# Altium PCB LCD TEST BOART-A8.PcbDoc (part 1 of 2)
Units mm, origin at the board's own origin, x right, y up, seen from the top; angles counter-clockwise.
Board outline 152.4 x 101.6 mm, 2 copper layers (Top Layer, Bottom Layer); 153 components, 128 nets, 620 pads, 196 vias.
Unrouted connection lines stored in the file: 57.
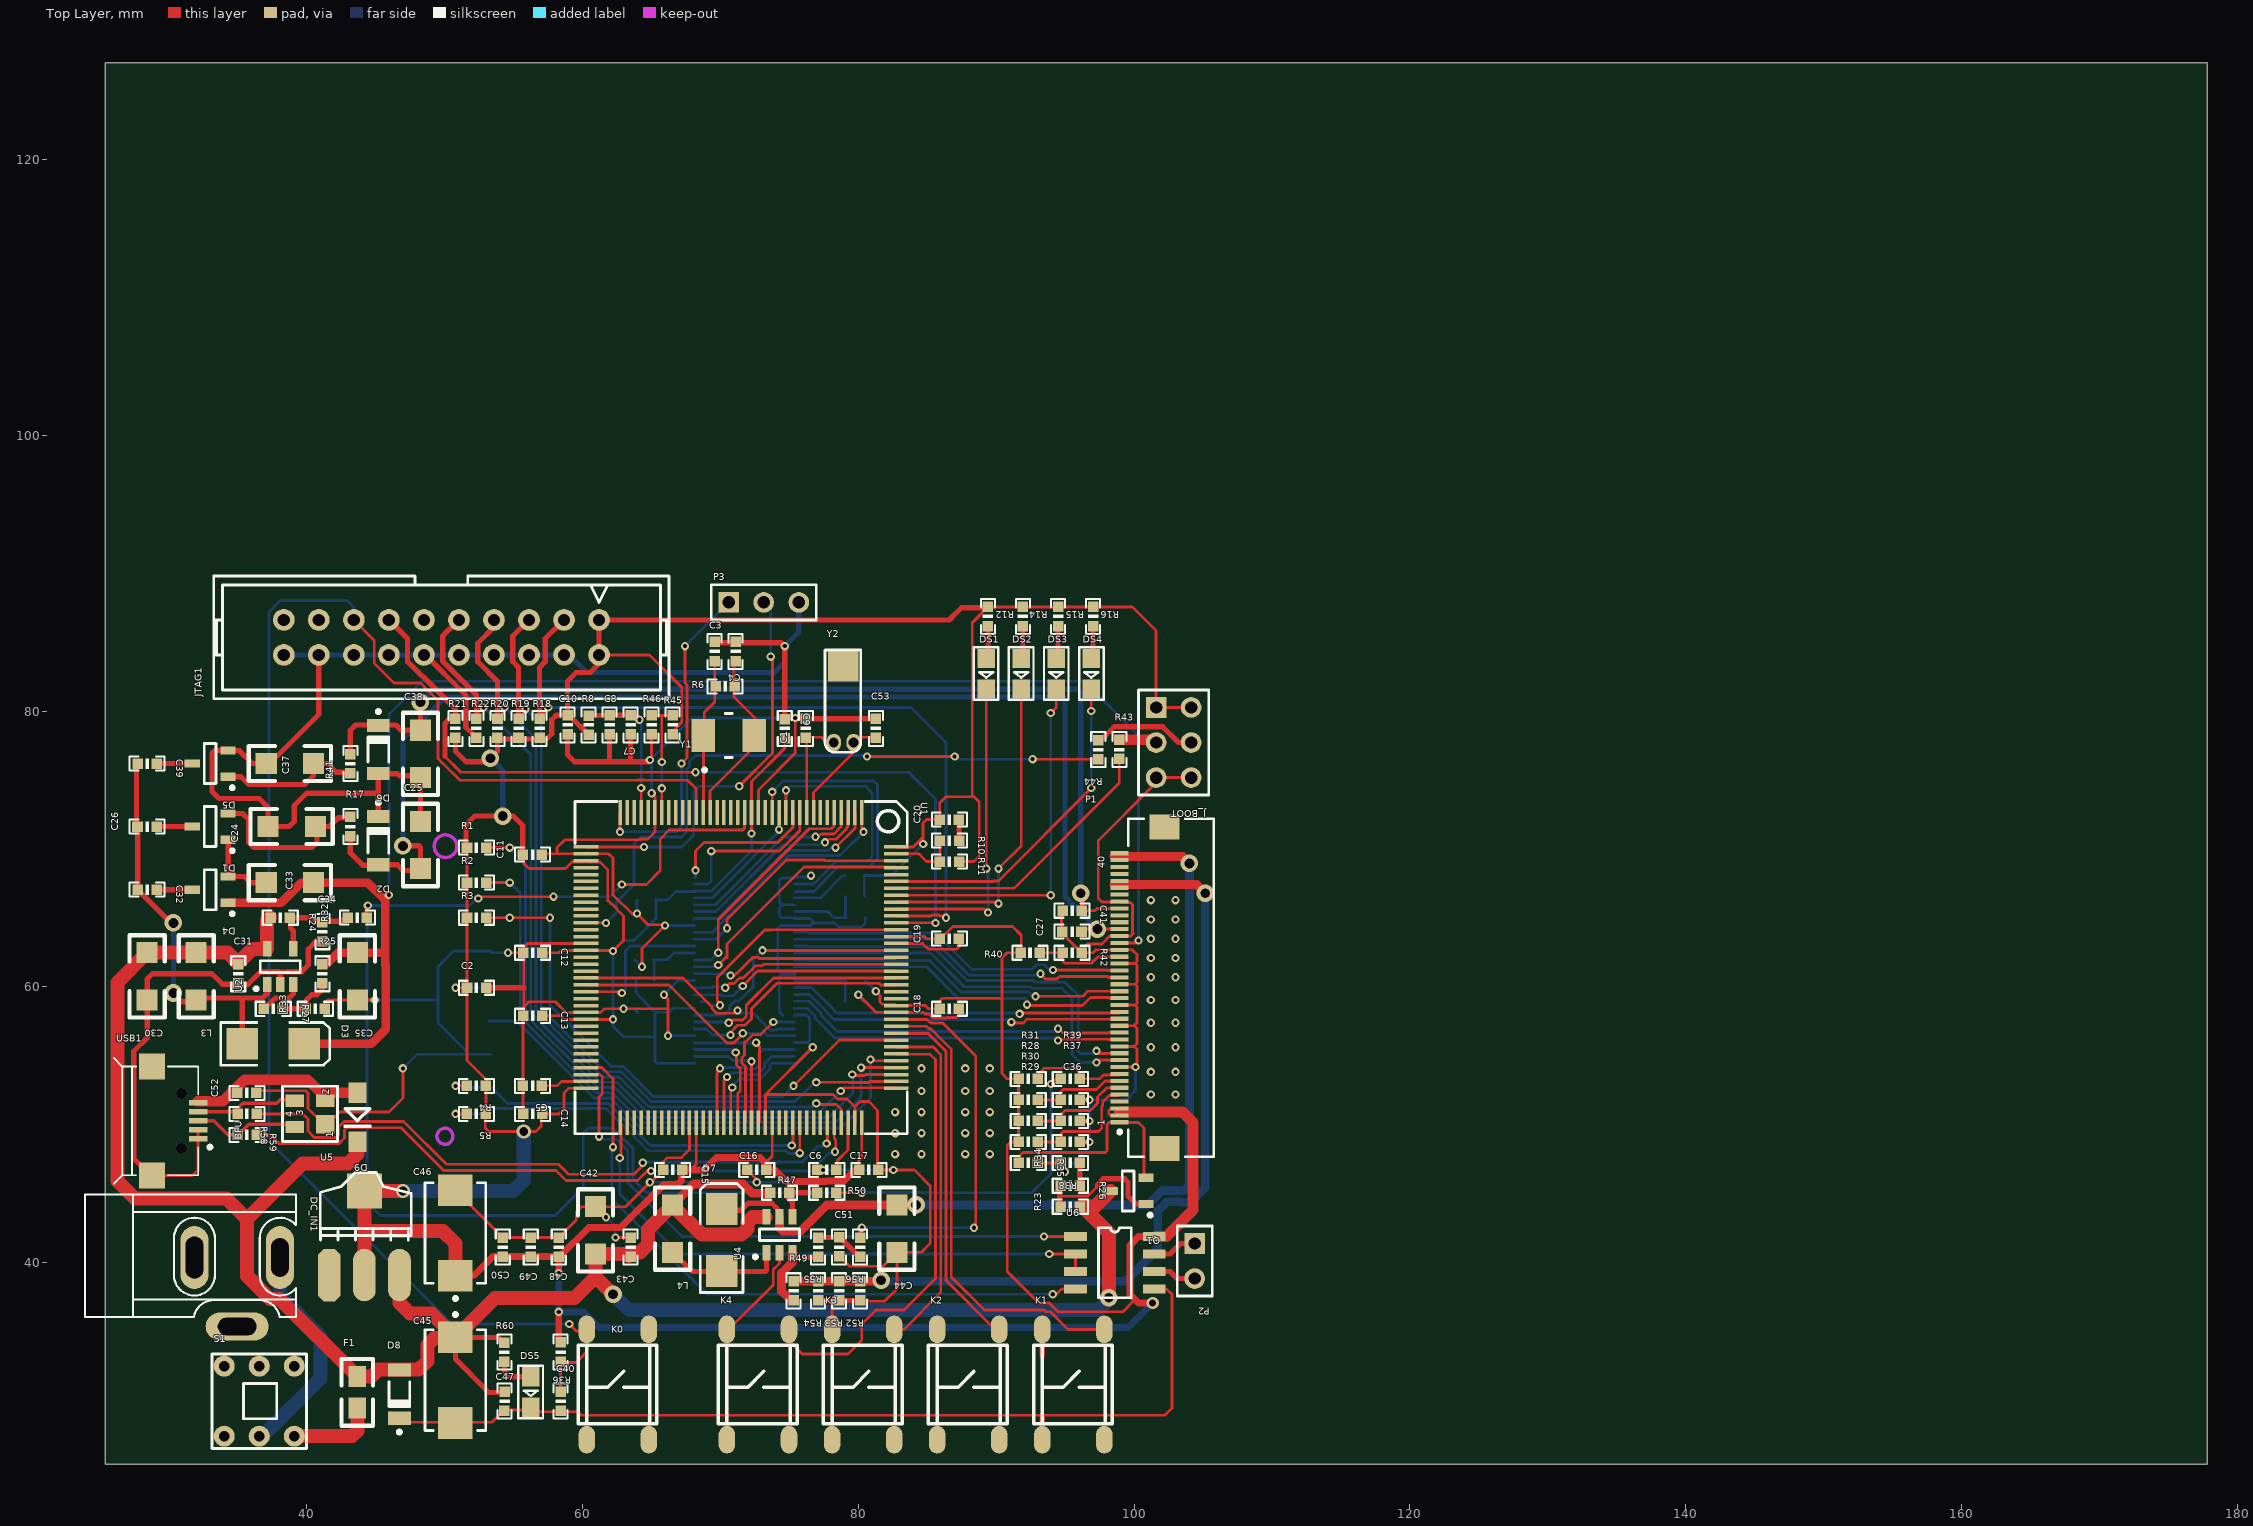
[diagram p0: Top Layer view]
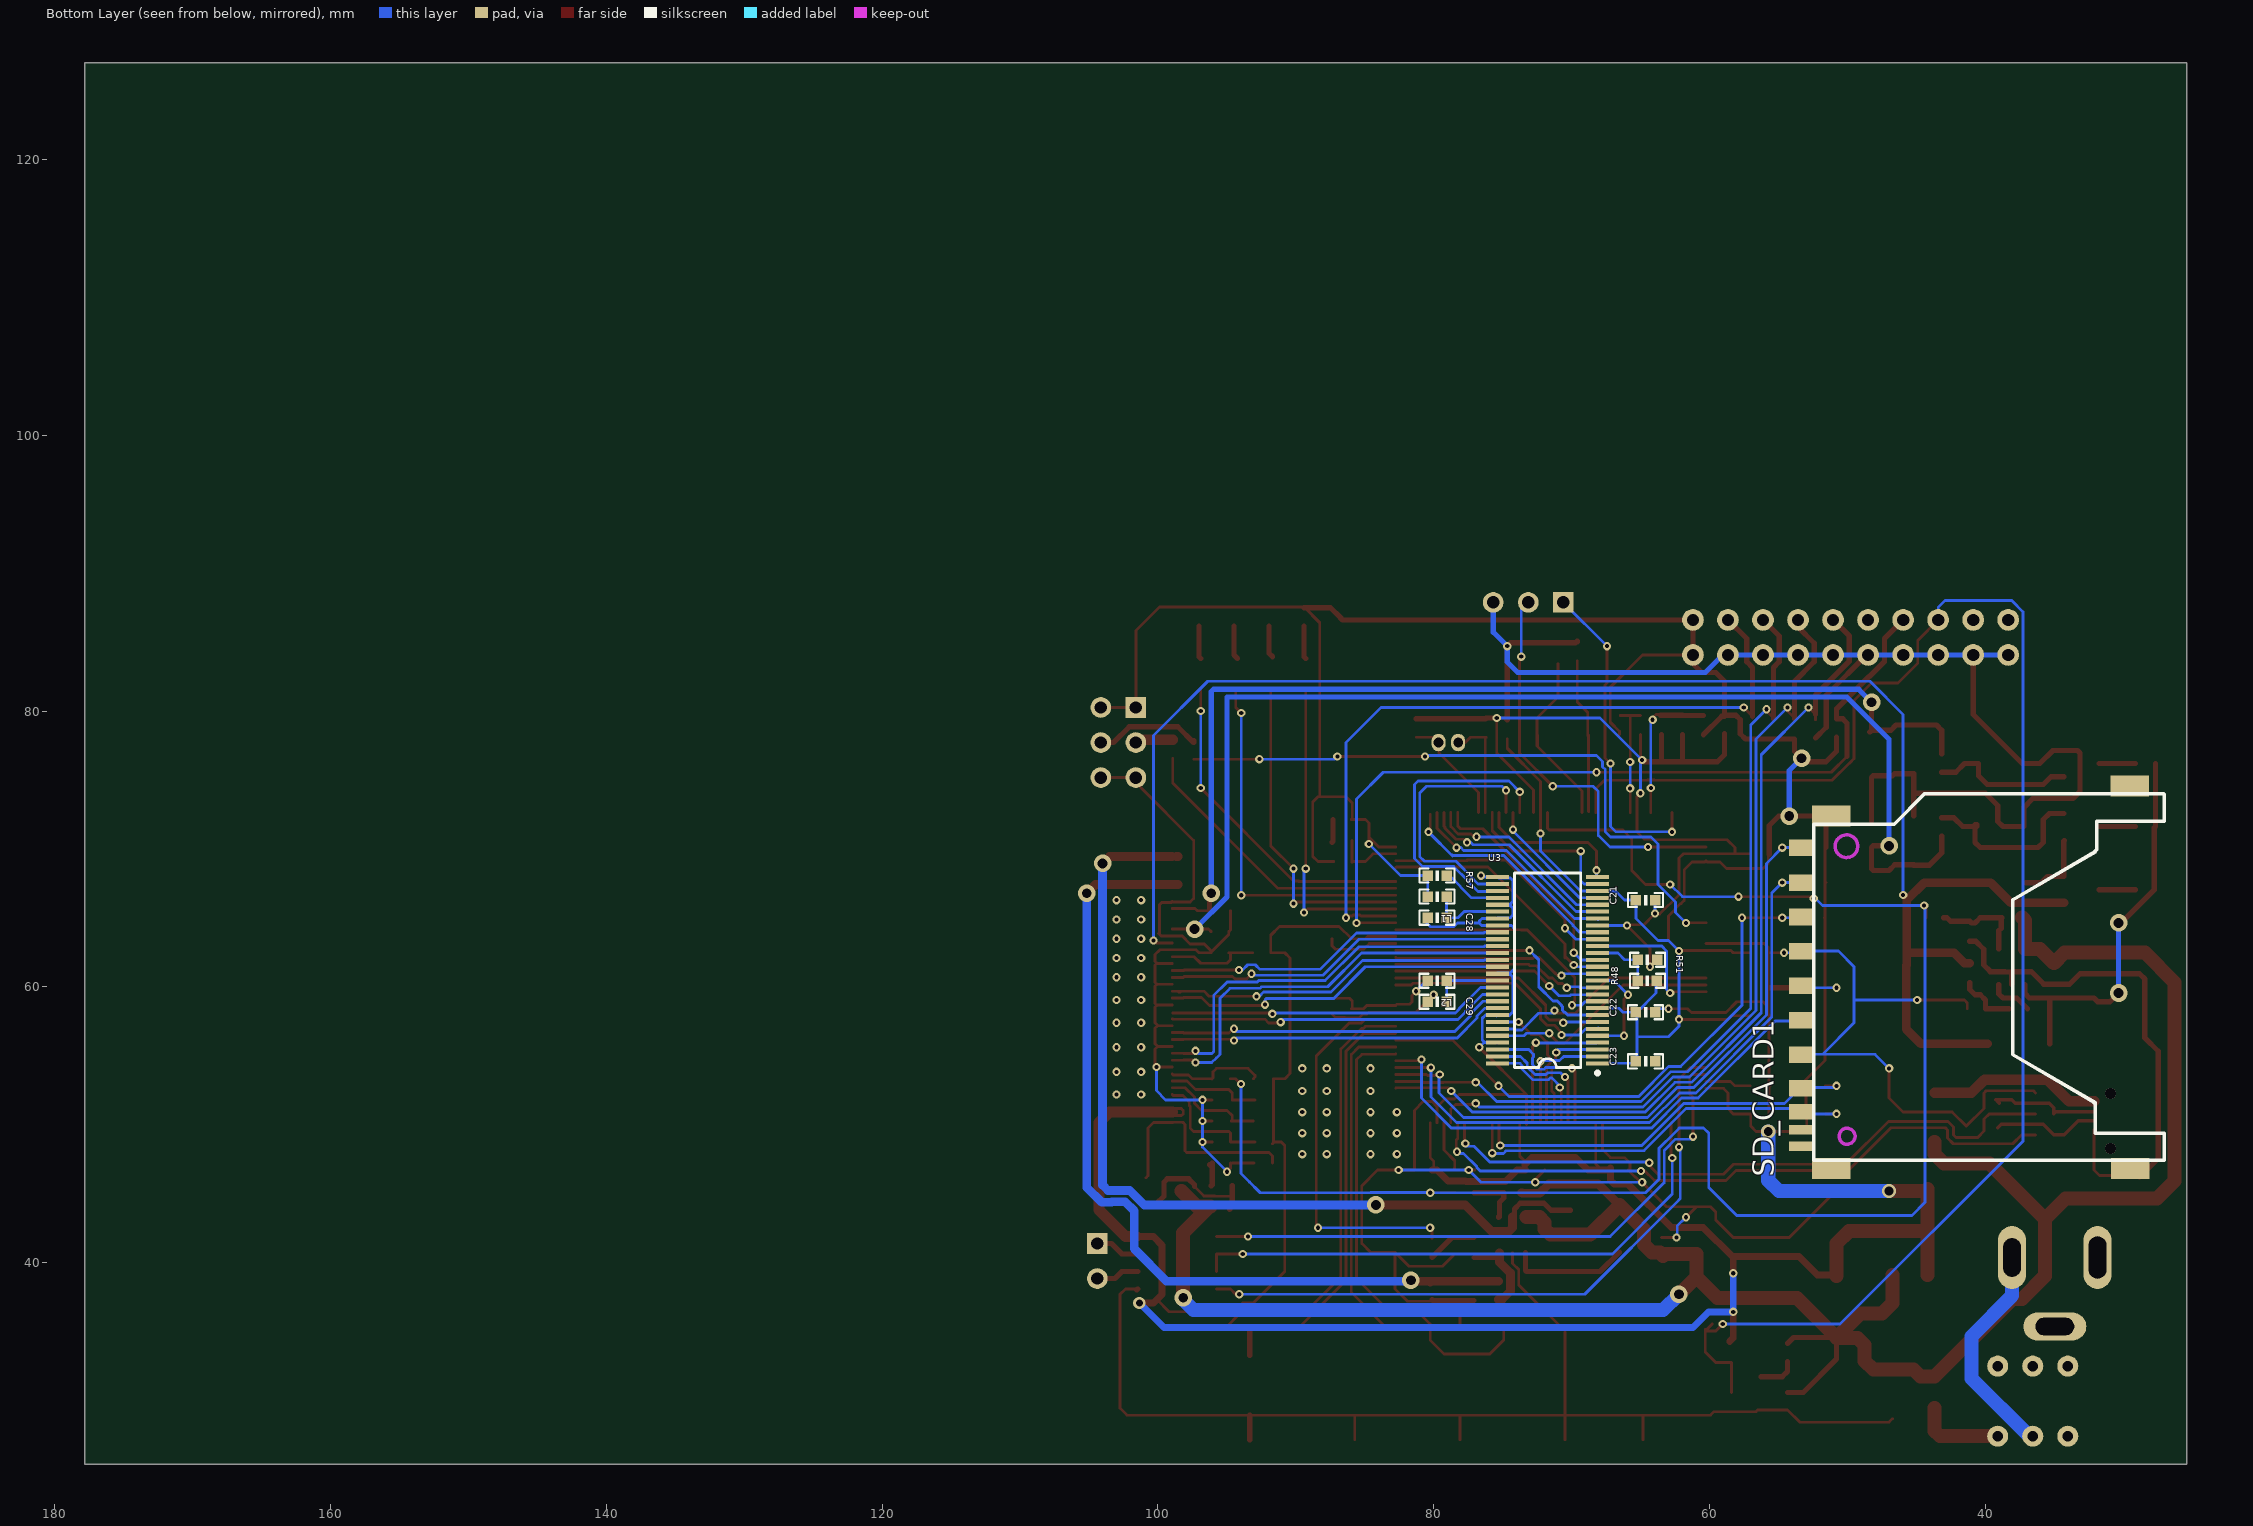
[diagram p1: Bottom Layer view, seen from below]

## Layer stack, top to bottom
Top Layer: signal copper 0.0356
Dielectric: dielectric 0.32, FR-4, Dk 4.8
Bottom Layer: signal copper 0.0356

## Board outline
25.4,25.4 177.8,25.4 177.8,127 25.4,127

## Design rules (kind name [scope] priority, off if disabled: settings)
Clearance [All] p1: gap=0.178
DiffPairsRouting [All] p1: maxlimit=0.254 minlimit=0.254 mostfreqgap=0.254 maxuncoupledlength=12.7
MinimumSolderMaskSliver [All] p1: minsoldermaskwidth=0.025
PolygonConnect [All] p1: connectstyle=Relief reliefconductorwidth=0.254 reliefentries=4 polygonreliefangle="90 Angle"
RoutingVias [All] p1: holewidth=0.3 width=0.6 viastyle="Through Hole" minholewidth=0.3 minwidth=0.6 maxholewidth=0.3 maxwidth=0.6
SilkToSilkClearance [All] p1: silktosilkclearance=0.025
SilkscreenOverComponentPads [All] p1: minsilkscreentomaskgap=0
SolderMaskExpansion [All] p1: expansion=0.102
Width [All] p1: maxlimit=2.54 minlimit=0.152 preferedwidth=0.254 minimp=50.000000 maximp=50.000000 favimp=50.000000
24 further rules are at their usual default settings.

## Classes and differential pairs
differential pair RXCLKIN: +RXCLKIN_P -RXCLKIN_N
differential pair RXIN0: +RXIN0_P -RXIN0_N
differential pair RXIN1: +RXIN1_P -RXIN1_N
differential pair RXIN2: +RXIN2_P -RXIN2_N
differential pair RXIN3: +RXIN3_P -RXIN3_N
differential pair USB_D: +USB_D_P -USB_D_N

## Components (designator, comment, footprint, x,y, rotation, side; value= is the part's Value field where it differs from the comment)
BFU "SP0503" SOT143 40.259,50.8 r90 top
C1 "10" 0603P 76.2,78.74 r90 top
C2 "104" 0603P 52.324,59.944 r0 top
C3 "22" 0603P 69.596,84.328 r270 top
C4 "22" 0603P 71.12,84.328 r270 top
C5 "225" 0603P 56.388,52.832 r180 top
C6 "225" 0603P 77.724,46.736 r180 top
C7 "10u" 0603P 63.5,78.994 r90 top
C8 "104" 0603P 61.976,78.994 r90 top
C9 "104" 0603P 74.676,78.74 r270 top
C10 "104" 0603P 58.928,78.994 r90 top
C11 "104" 0603P 56.388,69.596 r180 top
C12 "104" 0603P 56.388,62.484 r0 top
C13 "104" 0603P 56.388,57.912 r0 top
C14 "104" 0603P 56.388,50.8 r0 top
C15 "104" 0603P 66.548,46.736 r0 top
C16 "104" 0603P 72.644,46.736 r0 top
C17 "104" 0603P 80.772,46.736 r180 top
C18 "104" 0603P 86.614,58.42 r180 top
C19 "104" 0603P 86.614,63.5 r180 top
C20 "104" 0603P 86.614,72.136 r180 top
C21 "104" 0603P 64.643,66.294 r0 bottom
C22 "104" 0603P 64.643,58.166 r0 bottom
C23 "104" 0603P 64.643,54.61 r0 bottom
C24 "10uF/25V" 1206 40.64,71.628 r180 top
C25 "10uF/25V" 1206 48.26,68.58 r90 top
C26 "104" 0603P 28.448,71.628 r180 top
C27 "104" 0603P 95.504,64.008 r180 top
C28 "104" 0603P 79.756,65.024 r180 bottom
C29 "104" 0603P 79.756,58.928 r180 bottom
C30 "10uF/25V" 1206 28.448,62.484 r270 top
C31 "104" 0603P 35.052,60.96 r90 top
C32 "104" 0603P 28.448,67.056 r0 top
C33 "10uF/25V" 1206 37.084,67.564 r0 top
C34 "104" 0603P 41.148,64.008 r90 top
C35 "2.2uF/25V" 1206 43.688,62.484 r270 top
C36 "104" 0603P 95.377,48.768 r180 top
C37 "10uF/25V" 1206 37.084,76.2 r0 top
C38 "10uF/25V" 1206 48.26,75.184 r90 top
C39 "104" 0603P 28.448,76.2 r0 top
C40 "104" 0603P 58.42,29.972 r90 top
C41 "104" 0603P 95.504,65.532 r0 top
C42 "10uF/25V" 1206 60.96,40.64 r90 top
C43 "104" 0603P 63.5,41.148 r270 top
C44 "2.2uF/25V" 1206 82.804,44.196 r270 top
C45 "Cap Tantalum" 7343 50.8,31.496 r270 top
C46 "Cap Tantalum" 7343 50.8,42.164 r90 top
C47 "22uF" 0603P 54.356,29.972 r90 top
C48 "22uF" 0603P 58.293,41.148 r270 top
C49 "104" 0603P 56.261,41.148 r270 top
C50 "104" 0603P 54.229,41.148 r270 top
C51 "104" 0603P 78.61,41.148 r90 top
C52 "104" 0603P 35.687,52.324 r180 top
C53 "10" 0603P 81.28,78.74 r90 top
D1 "BAV99" SOT-23-3L 33.02,71.628 r180 top
D2 "ZMM18" LL-34 45.212,70.612 r270 top
D3 "MBR0520" DSO-C2/X2.3 37.592,55.88 r0 top
D4 "BAV99" SOT-23-3L 33.02,67.056 r180 top
D5 "BAV99" SOT-23-3L 33.02,76.2 r180 top
D6 "ZMM10" LL-34 45.212,77.216 r270 top
D7 "MBR0520" DSO-C2/X2.3 70.104,41.656 r90 top
D8 "ZMM5V1" LL-34 46.736,30.48 r90 top
D9 "1N4148" DIODE_SOP 43.688,52.324 r270 top
DC_IN1 "POWER" DC10B 27.432,36.068 r0 top locked
DS1 "LED1" SMDLED 89.281,83.82 r270 top
DS2 "LED1" SMDLED 91.821,83.82 r270 top
DS3 "LED1" SMDLED 94.361,83.82 r270 top
DS4 "LED1" SMDLED 96.901,83.82 r270 top
DS5 "LED1" SMDLED 56.261,31.75 r270 top
F1 "Fuse 1" 0805 43.688,29.464 r90 top
J_BOOT "Header 3X2" HDR2X3 101.6,80.264 r270 top locked
JTAG1 "JTAG" JTAG_20 49.784,85.344 r180 top locked
K0 "KEY_M" K贴片 60.325,27.178 r0 top locked
K1 "KEY_M" K贴片 93.345,27.178 r0 top locked
K2 "KEY_M" K贴片 85.725,27.178 r0 top locked
K3 "KEY_M" K贴片 78.105,27.178 r0 top locked
K4 "KEY_M" K贴片 70.485,27.178 r0 top locked
L1 "Inductor" 0603P 79.756,66.548 r0 bottom
L2 "Inductor" 0603P 79.756,60.452 r0 bottom
L3 "Inductor" 1206 32.004,62.484 r270 top
L4 "Inductor" 1206 66.548,44.196 r270 top
P1 "MHDR2X20" FH12A-40S-0.5SH 100.584,59.944 r90 top locked
P2 "Header 2" HDR1X2 104.394,41.402 r270 top
P3 "Header 3H" HDR1X3 70.612,87.884 r0 top locked
Q1 "2N3904" SOT-23-3L 99.568,45.212 r180 top
R1 "47K" 0603P 52.324,70.104 r0 top
R2 "47K" 0603P 52.324,67.564 r0 top
R3 "47K" 0603P 52.324,65.024 r0 top
R4 "47K" 0603P 52.324,52.832 r180 top
R5 "47K" 0603P 52.324,50.8 r180 top
R6 "1M" 0603P 70.356,81.788 r0 top
R8 "10" 0603P 60.452,78.994 r270 top
R10 "0" 0603P 86.614,70.612 r0 top
R11 "0" 0603P 86.614,69.088 r0 top
R12 "510" 0603P 89.408,86.868 r270 top
R14 "510" 0603P 91.948,86.868 r270 top
R15 "510" 0603P 94.488,86.868 r270 top
R16 "510" 0603P 97.028,86.868 r270 top
R17 "1.5K" 0603P 43.18,71.628 r90 top
R18 "10K" 0603P 56.896,78.74 r90 top
R19 "10K" 0603P 55.372,78.74 r90 top
R20 "10K" 0603P 53.848,78.74 r90 top
R21 "10K" 0603P 50.8,78.74 r90 top
R22 "10K" 0603P 52.324,78.74 r90 top
R23 "10K" 0603P 95.377,44.069 r180 top
R24 "10K" 0603P 38.1,65.024 r0 top
R25 "0" 0603P 41.148,60.96 r90 top
R26 "10K" 0603P 95.377,45.593 r0 top
R27 "100K" 0603P 37.592,58.42 r0 top
R28 "10K" 0603P 92.329,51.816 r180 top
R29 "10K" 0603P 92.329,48.768 r0 top
R30 "10K" 0603P 92.329,50.292 r0 top
R31 "10K" 0603P 92.329,53.34 r180 top
R32 "0" 0603P 43.688,65.024 r180 top
R33 "0" 0603P 40.64,58.42 r180 top
R34 "10K" 0603P 95.377,47.241 r180 top
R35 "10K" 0603P 92.329,47.244 r0 top
R36 "10K" 0603P 58.42,33.528 r90 top
R37 "10K" 0603P 95.377,51.816 r0 top
R38 "10K" 0603P 95.377,50.292 r0 top
R39 "0" 0603P 95.377,53.34 r0 top
R40 "10K" 0603P 92.456,62.484 r0 top
R41 "270R" 0603P 43.18,76.2 r270 top
R42 "10K" 0603P 95.504,62.484 r0 top
R43 "10K" 0603P 98.933,77.216 r90 top
R44 "10K" 0603P 97.409,77.216 r270 top
R45 "0" 0603P 66.548,78.994 r90 top
R46 "0" 0603P 65.024,78.994 r90 top
R47 "10K" 0603P 74.295,45.085 r0 top
R48 "10K" 0603P 64.516,60.452 r0 bottom
R49 "10K" 0603P 75.311,37.973 r90 top
R50 "0" 0603P 77.724,45.082 r180 top
R51 "10K" 0603P 64.516,61.976 r180 bottom
R52 "1.1" 0603P 80.137,37.973 r270 top
R53 "1.2" 0603P 78.613,37.973 r270 top
R54 "1.1" 0603P 77.089,37.973 r270 top
R55 "3K" 0603P 77.089,41.148 r270 top
R56 "82K" 0603P 80.137,41.148 r270 top
R57 "4.8K" 0603P 79.756,68.072 r180 bottom
R58 "22" 0603P 35.687,50.8 r0 top
R59 "22" 0603P 35.687,49.276 r0 top
R60 "1K" 0603P 54.356,33.528 r270 top
S1 "SW-SPDT" 自锁开关6 34.036,27.432 r0 top locked
SD_CARD1 "sd card" SDCARD_L 53.34,67.564 r90 bottom
U1 "STM32F407ZET6" LQFP144 80.264,72.644 r270 top locked
U2 "MP1541DJ" SOT-23-5L 38.1,61.468 r90 top
U3 "SN75LVDS83B" DGG056 71.755,61.214 r90 bottom locked
U4 "MP3202DJ" SOT-23-6L 74.295,42.037 r90 top
U5 "AMS1117-3.3" AMS1117 41.656,39.116 r0 top
U6 "SP3485" SOP-8 95.758,41.91 r0 top
USB1 "USB_Receptacle" Micro_USB 30.48,50.292 r0 top
Y1 "8MHz" SMD2_50X32 70.612,78.232 r90 top
Y2 "32.768K" XTAL32 78.232,77.724 r90 top

## Footprints (in the part's own frame and the unit in brackets; to place one, negate y for a bottom-side part, rotate by r counter-clockwise, add the part's x,y. Pads: shape width x height; smd on the part's side, far side on the other; paste and mask are expansions set on the pad)
0603P [mil]
  rect 30x30 smd: 1(-27,0) 2(27.5,-0.06)
  silkscreen extent -50,-20 50,20
0805 [mil]
  rect 60x50 smd: 1(0,-0.06) 2(90,-0.06)
  silkscreen extent -50,-45 140,45
1206 [mil]
  rect 60x60 smd: 1(0,0) 2(135,0)
  silkscreen extent -50,-50 185,50
7343 [mm]
  rect 2.3x2.5 smd: 1(-3.1,0) 2(3.1,0)
  silkscreen extent -4.87,-2.2 3.65,2.2
AMS1117 [mil]
  oct 65x150 smd: 1(0.03,-0.06)
  oval 65x150 smd: 2(100.03,-0.06) 3(200.03,-0.06)
  rect 100x100 smd: 4(100.03,239.94)
  silkscreen extent -26,100 234,293
DC10B [mil]
  oval 80x180 hole 50 slot 110 at 90 deg: 1(419.09,170)
  oval 80x180 hole 50 slot 120 at 90 deg: 2(175,170)
  oval 180x80 hole 50 slot 110 at 0 deg: 3(297.05,-26.85)
  silkscreen extent -138,0 465,350
DGG056 [mm] "Shrink Small Outline; 56 Leads; Body Width 6.1 mm; Pitch 0.5 mm"
  rect 0.3x1.65 smd: 1(-6.75,-3.625) 2(-6.25,-3.625) 3(-5.75,-3.625) 4(-5.25,-3.625) 5(-4.75,-3.625) 6(-4.25,-3.625) 7(-3.75,-3.625) 8(-3.25,-3.625) 9(-2.75,-3.625) 10(-2.25,-3.625) 11(-1.75,-3.625) 12(-1.25,-3.625) 13(-0.75,-3.625) 14(-0.25,-3.625) 15(0.25,-3.625) 16(0.75,-3.625) 17(1.25,-3.625) 18(1.75,-3.625) 19(2.25,-3.625) 20(2.75,-3.625) 21(3.25,-3.625) 22(3.75,-3.625) 23(4.25,-3.625) 24(4.75,-3.625) 25(5.25,-3.625) 26(5.75,-3.625) 27(6.25,-3.625) 28(6.75,-3.625) 29(6.75,3.625) 30(6.25,3.625) 31(5.75,3.625) 32(5.25,3.625) 33(4.75,3.625) 34(4.25,3.625) 35(3.75,3.625) 36(3.25,3.625) 37(2.75,3.625) 38(2.25,3.625) 39(1.75,3.625) 40(1.25,3.625) 41(0.75,3.625) 42(0.25,3.625) 43(-0.25,3.625) 44(-0.75,3.625) 45(-1.25,3.625) 46(-1.75,3.625) 47(-2.25,3.625) 48(-2.75,3.625) 49(-3.25,3.625) 50(-3.75,3.625) 51(-4.25,3.625) 52(-4.75,3.625) 53(-5.25,3.625) 54(-5.75,3.625) 55(-6.25,3.625) 56(-6.75,3.625)
  silkscreen extent -7.57,-3.75 7.05,2.4
DIODE_SOP [mm]
  rect 1.5x1.3 smd: 1(0,0) 2(3.556,0)
  silkscreen extent 1.14,-1.02 2.56,1.02
DSO-C2/X2.3 [mm] "DO-214-AA/SMB; 2 C-Bend Leads; Body 5.3 x 3.6 mm, inc. leads (LxW)"
  rect 2.3x2.3 smd: 1(-2.25,0) 2(2.25,0)
  silkscreen extent -3.8,-1.55 4.1,1.55
FH12A-40S-0.5SH [mm] "Connector; FH12 Series; 40 Position; 0.5mm Spaced Top Contact"
  rect 0.3x1.3 smd: 1(-9.75,1.625) 2(-9.25,1.625) 3(-8.75,1.625) 4(-8.25,1.625) 5(-7.75,1.625) 6(-7.25,1.625) 7(-6.75,1.625) 8(-6.25,1.625) 9(-5.75,1.625) 10(-5.25,1.625) 11(-4.75,1.625) 12(-4.25,1.625) 13(-3.75,1.625) 14(-3.25,1.625) 15(-2.75,1.625) 16(-2.25,1.625) 17(-1.75,1.625) 18(-1.25,1.625) 19(-0.75,1.625) 20(-0.25,1.625) 21(0.25,1.625) 22(0.75,1.625) 23(1.25,1.625) 24(1.75,1.625) 25(2.25,1.625) 26(2.75,1.625) 27(3.25,1.625) 28(3.75,1.625) 29(4.25,1.625) 30(4.75,1.625) 31(5.25,1.625) 32(5.75,1.625) 33(6.25,1.625) 34(6.75,1.625) 35(7.25,1.625) 36(7.75,1.625) 37(8.25,1.625) 38(8.75,1.625) 39(9.25,1.625) 40(9.75,1.625)
  rect 1.8x2.2 smd: 41(-11.65,-1.625) 42(11.65,-1.625)
  silkscreen extent -12.25,-5.2 12.25,1.75
HDR1X2 [mm] "Connector; Header; 2 Position"
  rect 1.5x1.5 hole 0.9: 1(0,0)
  round 1.5 hole 0.9: 2(2.54,0)
  silkscreen extent -1.27,-1.27 3.81,1.27
HDR1X3 [mm] "Connector; Header; 3 Position"
  rect 1.5x1.5 hole 0.9: 1(0,0)
  round 1.5 hole 0.9: 2(2.54,0) 3(5.08,0)
  silkscreen extent -1.27,-1.27 6.35,1.27
HDR2X3 [mm]
  rect 1.5x1.5 hole 0.9: 1(0,0)
  round 1.5 hole 0.9: 2(0,2.54) 3(2.54,0) 4(2.54,2.54) 5(5.08,0) 6(5.08,2.54)
  silkscreen extent -1.27,-1.27 6.35,3.81
JTAG_20 [mil]
  round 62 hole 35: 1(-450,-50) 2(-450,50) 3(-350,-50) 4(-350,50) 5(-250,-50) 6(-250,50) 7(-150,-50) 8(-150,50) 9(-50,-50) 10(-50,50) 11(50,-50) 12(50,50) 13(150,-50) 14(150,50) 15(250,-50) 16(250,50) 17(350,-50) 18(350,50) 19(450,-50) 20(450,50)
  silkscreen extent -650,-175 650,175
K贴片 [mm] "6mmX6mm"
  oval 1.2x2 smd: 1(0,0) 1(0,8) 2(4.5,0) 2(4.5,8)
  silkscreen extent -0.64,1.14 5.08,6.86
LL-34 [mm]
  rect 0.95x1.65 smd: 1(-1.75,0) 2(1.75,0)
  silkscreen extent -2.87,-0.75 0.9,0.75
LQFP144 [mm]
  rect 1.8x0.254 smd: 1(-0.009,0.001) 2(-0.009,-0.499) 3(-0.009,-0.999) 4(-0.009,-1.499) 5(-0.009,-1.999) 6(-0.009,-2.499) 7(-0.009,-2.999) 8(-0.009,-3.499) 9(-0.009,-3.999) 10(-0.009,-4.499) 11(-0.009,-4.999) 12(-0.009,-5.499) 13(-0.009,-5.999) 14(-0.009,-6.499) 15(-0.009,-6.999) 16(-0.009,-7.499) 17(-0.009,-7.999) 18(-0.009,-8.499) 19(-0.009,-8.999) 20(-0.009,-9.499) 21(-0.009,-9.999) 22(-0.009,-10.499) 23(-0.009,-10.999) 24(-0.009,-11.499) 25(-0.009,-11.999) 26(-0.009,-12.499) 27(-0.009,-12.999) 28(-0.009,-13.499) 29(-0.009,-13.999) 30(-0.009,-14.499) 31(-0.009,-14.999) 32(-0.009,-15.499) 33(-0.009,-15.999) 34(-0.009,-16.499) 35(-0.009,-16.999) 36(-0.009,-17.499) 73(22.491,-17.499) 74(22.491,-16.999) 75(22.491,-16.499) 76(22.491,-15.999) 77(22.491,-15.499) 78(22.491,-14.999) 79(22.491,-14.499) 80(22.491,-13.999) 81(22.491,-13.499) 82(22.491,-12.999) 83(22.491,-12.499) 84(22.491,-11.999) 85(22.491,-11.499) 86(22.491,-10.999) 87(22.491,-10.499) 88(22.491,-9.999) 89(22.491,-9.499) 90(22.491,-8.999) 91(22.491,-8.499) 92(22.491,-7.999) 93(22.491,-7.499) 94(22.491,-6.999) 95(22.491,-6.499) 96(22.491,-5.999) 97(22.491,-5.499) 98(22.491,-4.999) 99(22.491,-4.499) 100(22.491,-3.999) 101(22.491,-3.499) 102(22.491,-2.999) 103(22.491,-2.499) 104(22.491,-1.999) 105(22.491,-1.499) 106(22.491,-0.999) 107(22.491,-0.499) 108(22.491,0.001)
  rect 0.254x1.8 smd: 37(2.491,-19.999) 38(2.991,-19.999) 39(3.491,-19.999) 40(3.991,-19.999) 41(4.491,-19.999) 42(4.991,-19.999) 43(5.491,-19.999) 44(5.991,-19.999) 45(6.491,-19.999) 46(6.991,-19.999) 47(7.491,-19.999) 48(7.991,-19.999) 49(8.491,-19.999) 50(8.991,-19.999) 51(9.491,-19.999) 52(9.991,-19.999) 53(10.491,-19.999) 54(10.991,-19.999) 55(11.491,-19.999) 56(11.991,-19.999) 57(12.491,-19.999) 58(12.991,-19.999) 59(13.491,-19.999) 60(13.991,-19.999) 61(14.491,-19.999) 62(14.991,-19.999) 63(15.491,-19.999) 64(15.991,-19.999) 65(16.491,-19.999) 66(16.991,-19.999) 67(17.491,-19.999) 68(17.991,-19.999) 69(18.491,-19.999) 70(18.991,-19.999) 71(19.491,-19.999) 72(19.991,-19.999) 109(19.991,2.501) 110(19.491,2.501) 111(18.991,2.501) 112(18.491,2.501) 113(17.991,2.501) 114(17.491,2.501) 115(16.991,2.501) 116(16.491,2.501) 117(15.991,2.501) 118(15.491,2.501) 119(14.991,2.501) 120(14.491,2.501) 121(13.991,2.501) 122(13.491,2.501) 123(12.991,2.501) 124(12.491,2.501) 125(11.991,2.501) 126(11.491,2.501) 127(10.991,2.501) 128(10.491,2.501) 129(9.991,2.501) 130(9.491,2.501) 131(8.991,2.501) 132(8.491,2.501) 133(7.991,2.501) 134(7.491,2.501) 135(6.991,2.501) 136(6.491,2.501) 137(5.991,2.501) 138(5.491,2.501) 139(4.991,2.501) 140(4.491,2.501) 141(3.991,2.501) 142(3.491,2.501) 143(2.991,2.501) 144(2.491,2.501)
  silkscreen extent -0.81,-20.8 23.29,3.3
Micro_USB [mm] "Micro_USB Dock 5 Pin"
  rect 1.35x0.4 smd: 1(1.679,1.3) 2(1.679,0.65) 3(1.679,0) 4(1.679,-0.65) 5(1.679,-1.3)
  rect 1.9x1.9 smd: 6(-1.679,-3.95) ""(-1.679,3.95)
  silkscreen extent -4.46,-4.57 2.64,4.57
SDCARD_L [mm]
  rect 1.2x1.8 smd: 1(0,0) 2(-2.489,0) 3(-4.983,-0.009) 4(-7.483,-0.009) 5(-9.983,-0.009) 6(-12.483,-0.009) 7(-14.908,-0.009) 9(2.517,-0.009)
  rect 1.1x1.8 smd: 8(-16.612,0)
  rect 0.7x1.8 smd: 10(-17.908,-0.009) 12(-19.101,0)
  rect 1.5x2.8 smd: 11(-20.726,-23.834) 11(-20.726,-2.143) 11(4.826,-2.143) 11(7.01,-23.784)
  Keep-Out Layer circle w0.254: c2.642,-3.26 r0.82
  Keep-Out Layer circle w0.254: c-18.39,-3.3 r0.58
  silkscreen extent -20.13,-26.3 6.44,-0.9
SMD2_50X32 [mm]
  rect 2.4x1.7 smd: 1(0,1.85) 2(0,-1.85)
  silkscreen extent -2.62,-0.25 1.6,1.87
SMDLED [mm]
  rect 1.4x1.27 smd: 1(0.001,-0.002) 2(2.211,-0.002)
  silkscreen extent -0.8,-0.89 3.01,0.89
SOP-8 [mil]
  rect 65x25 smd: 1(0,0) 2(0,-50) 3(0,-100) 4(0,-150) 5(224.41,-150) 6(224.41,-100) 7(224.41,-50) 8(224.41,0)
  silkscreen extent 65,-175 159,25
SOT143 [mm]
  rect 1.35x1.35 smd: 1(-0.75,-1.1)
  rect 0.9x1.35 smd: 2(0.95,-1.1) 3(0.95,1.1) 4(-0.95,1.1)
  silkscreen extent -2,-2 2,2
SOT-23-3L [mm]
  rect 1.1x0.6 smd: 1(-1.3,0.95) 2(-1.3,-0.95) 3(1.3,0)
  silkscreen extent -1.73,-1.45 0.43,1.87
SOT-23-5L [mm]
  rect 1.1x0.6 smd: 1(-1.3,0.95) 2(-1.3,0) 3(-1.3,-0.95) 4(1.3,-0.95) 5(1.3,0.95)
  silkscreen extent -1.72,-1.45 0.43,1.87
SOT-23-6L [mm]
  rect 1.1x0.6 smd: 1(-1.3,0.95) 2(-1.3,0) 3(-1.3,-0.95) 4(1.3,-0.95) 5(1.3,0) 6(1.3,0.95)
  silkscreen extent -1.72,-1.45 0.43,1.87
XTAL32 [mil]
  oval 50x40 hole 28: 1(0,0) 2(0,-56)
  rect 92.13x86 smd: ""(220,-27)
  silkscreen extent -28,-77 264,25
自锁开关6 [mil] "自锁开关6.6X6.6"
  round 60 hole 30: 1(0,0) 2(100,0) 3(200,0) 4(200,200) 5(100,200) 6(0,200)
  silkscreen extent -35,-35 235,235

## Part data
BFU: "Capacitor"
C1 C47 C48 C49 C50 C52 C53: library part C_2
C2 C3 C4 C5 C6 C7 C8 C9 C10 C11 C12 C13 C14 C15 C16 C17 C18 C19 C20 C21 C22 C23 C24 C25 C26 C27 C28 C29 C30 C31 C32 C33 C34 C35 C36 C37 C38 C39 C40 C41 C42 C43 C44 C51: library part C
C45 C46: "Polarized Capacitor (Surface Mount)"
D2 D6 D8: library part "D Zener", "Zener Diode"
D3 D7: library part "D Schottky", "Schottky Diode"
D9: library part D
DC_IN1: library part POW
DS1 DS2 DS3 DS4 DS5: library part LED2, "Typical RED, GREEN, YELLOW, AMBER GaAs LED"
F1: "Fuse"
J_BOOT: "Header, 3-Pin, Dual row"
P1: "Header, 20-Pin, Dual row"
P2: "Header, 2-Pin"
P3: "Header, 3-Pin, Right Angle"
Q1: "NPN General Purpose Amplifier"
R1 R2 R3 R4 R5 R6 R8 R10 R11 R12 R14 R15 R16 R17 R18 R19 R20 R21 R22 R23 R24 R25 R26 R27 R28 R29 R30 R31 R32 R33 R34 R35 R36 R37 R38 R39 R40 R41 R42 R43 R44 R45 R46 R47 R48 R49 R50 R51 R52 R53 R54 R55 R56 R57 R58 R59 R60: library part R
S1: "SPDT Subminiature Toggle Switch, Right Angle Mounting, Vertical Actuation"
U2: library part MP1541
U4: library part MP3202
U5: library part AMS1117
U6: library part MAX3485
USB1: library part 300008272, "B型USB插座，Series “B” Receptacles，Right Angle, T/H，4POS"
Y1: library part XTAL, "Crystal Oscillator"
Y2: library part XTAL_1, "Crystal Oscillator"

## Via types
v1: diameter 0.6, hole 0.3, Top Layer to Bottom Layer, 177 vias
v2: diameter 1.27, hole 0.711, Top Layer to Bottom Layer, 14 vias
v3: diameter 0.8, hole 0.8, Top Layer to Bottom Layer, 2 vias
v4: diameter 1.016, hole 0.635, Top Layer to Bottom Layer, 2 vias
v5: diameter 0.889, hole 0.508, Top Layer to Bottom Layer, 1 vias

## Nets (pads, with @x,y where several pads share a name; then routed paths per layer and width w, separated by ;. In a path a pad name is that pad's centre, name@x,y a point inside that pad or via, vN(x,y) a via of type N, cw(c..) or ccw(c..) an arc to the next point about the centre after c; other vN are vias at no path point)
AVDD: C33.2 C35.1 D3.2 D4.1 P1.27 R25.2 | length 119.8
  Top Layer w0.203: 45.593,66.294 45.657,66.358 v1(45.974,66.675) ; P1.27@98.959,63.194 100.151,63.194 v1(100.33,63.373)
  Top Layer w0.635: D4.1@34.32,66.106 38.166,66.106 39.624,67.564 C33.2@40.513,67.564 44.45,67.564 45.657,66.358 ; D3.2@39.842,55.88 44.704,55.88 45.753,56.929 45.753,61.562 45.72,61.595 ; R25.2@41.148,61.722 41.529,61.722 42.291,62.484 C35.1@43.688,62.484 45.72,62.484 ; 45.72,61.722 45.72,62.484 ; 45.72,66.294 45.72,62.484
  Bottom Layer w0.203: v1(45.974,66.675) 45.974,79.756 48.387,82.169 96.393,82.169 100.33,78.232 v1(100.33,63.373)
B0: U1.141 U3.15 | length 18.3
  Top Layer w0.203: v1@69.869,61.576 v1(69.85,61.595) 70.485,62.23 ; 70.485,62.103 70.485,62.23 ; U1.141@82.765,68.653 82.711,68.707 76.073,68.707 70.485,63.119 70.485,62.23
  Bottom Layer w0.203: U3.15@68.13,61.464 69.719,61.464 v1(69.85,61.595)
B1: U1.142 U3.19 | length 17.4
  Top Layer w0.203: v1(70.485,64.262) 70.485,64.897 70.721,65.133 70.739,65.151 74.803,69.215 77.597,69.215 ; 77.597,69.153 U1.142@82.765,69.153
  Bottom Layer w0.203: U3.19@68.13,63.464 69.687,63.464 v1(70.485,64.262)
B2: U1.1 U3.20 | length 17
  Top Layer w0.203: U1.1@80.264,72.517 80.264,71.247 v1(80.391,71.247)
  Bottom Layer w0.203: U3.20@68.13,63.964 69.425,63.964 69.906,64.445 69.906,64.502 74.928,69.525 78.599,69.525 78.642,69.567 ; 78.637,69.493 v1@80.328,71.183 ; v1@80.344,71.167 v1@80.328,71.183 ; v1@80.328,71.183 80.264,71.247 v1(80.391,71.247) v1@80.328,71.183
B3: U1.2 U3.22 | length 15.5
  Top Layer w0.203: v1(78.359,70.104) 79.765,71.51 U1.2@79.765,72.653
  Bottom Layer w0.203: U3.22@68.072,64.897 U3.22@68.13,64.897 ; U3.22@68.13,64.964 69.79,64.964 74.732,69.906 77.837,69.906 78.035,70.104 78.318,70.104 v1(78.359,70.104)
B4: U1.3 U3.23 | length 14.3
  Top Layer w0.203: 77.824,70.712 78.393,70.712 79.185,71.504 79.185,71.574 ; 79.248,71.628 79.265,71.645 U1.3@79.265,72.653
  Bottom Layer w0.203: U3.23@68.13,65.464 69.682,65.464 74.533,70.315 77.146,70.315 77.316,70.485 v1(77.597,70.485)
B5: U1.4 U3.24 | length 14.1
  Top Layer w0.203: v1(76.906,70.894) 77.061,70.894 77.089,70.866 77.316,71.093 78.235,71.093 78.765,71.622 U1.4@78.765,72.653
  Bottom Layer w0.203: U3.24@68.13,65.964 69.644,65.964 74.546,70.866 76.962,70.866 v1@76.948,70.852
B6: U1.5 U3.16 | length 16.6
  Top Layer w0.203: v1@69.977,62.484 69.85,62.611 69.85,64.87 76.454,71.474 77.007,71.474 77.022,71.474 78.078,71.474 78.265,71.661 U1.5@78.265,72.653
  Bottom Layer w0.203: U3.16@68.13,61.964 69.33,61.964 v1(69.85,62.484)
B7: U1.58 U3.18 | length 10.9
  Top Layer w0.203: U1.58@60.265,59.653 62.775,59.653 v1(62.865,59.563)
  Bottom Layer w0.203: v1(62.865,59.563) 63.119,59.817 63.119,62.611 63.472,62.964 U3.18@68.13,62.964
BL_DIM: R56.1 U1.119 | length 28.3
  Top Layer w0.203: R56.1@80.137,41.783 R56.1@80.137,41.834 80.137,42.418 v1(80.264,42.545) ; U1.119@82.765,57.653 84.988,57.653 85.261,57.38 86.13,57.38 88.519,54.991 88.519,42.672 v1(88.392,42.545)
  Bottom Layer w0.203: v1(80.264,42.545) v1(88.392,42.545)
BL_EN: R32.1 R39.1 R50.1 U1.18 | length 122.4
  Top Layer w0.203: R32.1@44.323,65.024 v1@44.323,65.786 ; v1@52.578,66.548 v1(57.912,66.548) ; v1(62.865,67.437) 64.643,67.437 65.646,68.44 65.646,70.739 65.659,70.739 66.294,71.374 71.628,71.374 71.765,71.511 U1.18@71.765,72.653 ; R50.1@78.41,45.082 v1(80.261,45.082) ; v1(93.98,52.959) 94.361,53.34 R39.1@94.691,53.34 R39.1@94.742,53.34
  Bottom Layer w0.203: v1@52.324,66.421 51.816,65.913 v1(44.45,65.913) 44.379,65.842 44.379,44.394 45.339,43.434 58.039,43.434 60.071,45.466 60.071,49.403 60.452,49.784 62.23,49.784 62.23,49.745 62.484,49.491 62.592,49.384 63.671,48.304 63.671,46.057 64.646,45.082 v1(80.261,45.082) 80.289,45.11 84.58,45.11 84.608,45.082 92.58,45.082 93.472,45.974 ; v1(57.912,66.548) 61.976,66.548 v1(62.865,67.437) ; 93.345,45.847 93.472,45.974 ; v1(93.98,52.959) 93.98,46.482 93.472,45.974
  other v1: 52.451,66.421
BOOT0: R43.1 U1.138 | length 21.1
  Top Layer w0.203: U1.138@82.765,67.153 91.283,67.153 98.933,74.803 R43.1@98.933,76.53 R43.1@98.933,76.581
BOOT1: R44.2 U1.48 | length 47.2
  Top Layer w0.203: U1.48@60.265,64.653 61.712,64.653 v1(61.722,64.643) ; v1(80.645,76.708) v1(86.995,76.708) ; v1(92.647,76.517) R44.2@97.407,76.517
  Bottom Layer w0.203: v1(61.722,64.643) 62.484,65.405 62.484,66.167 63.754,67.437 63.754,70.358 64.262,70.866 67.183,70.866 67.564,71.247 67.564,75.762 67.762,75.96 67.762,76.343 68.199,76.779 v1@80.574,76.779 ; v1(86.995,76.708) 87.185,76.517 v1(92.647,76.517)
CLK: U1.14 U3.31 | length 21.9
  Top Layer w0.203: U1.14@73.765,72.653 v1(73.765,74.146)
  Bottom Layer w0.203: v1(73.765,74.146) 74.549,74.93 81.153,74.93 81.407,74.676 81.407,69.311 80.828,68.732 79.945,68.732 79.943,68.731 78.561,68.731 77.541,67.711 77.541,67.674 76.796,66.929 U3.31@75.438,66.929
D_N: BFU.3 R58.1 USB1.2 | length 8
  Top Layer w0.254: USB1.2@32.159,50.942 34.91,50.942 35.052,50.8 35.052,51.233 35.381,51.562 37.846,51.562 38.1,51.816 BFU.3@39.243,51.816 ; BFU.3@38.989,51.562 BFU.3@39.116,51.689
D_P: BFU.4 R59.1 USB1.3 | length 7.8
  Top Layer w0.254: USB1.3@32.159,50.292 33.274,50.292 34.29,49.276 R59.1@35.001,49.276 35.052,49.276 35.814,50.038 38.862,50.038 BFU.4@39.116,49.784
ENABLE: U1.12 U3.30 | length 19.4
  Top Layer w0.203: U1.12@74.765,72.653 v1(74.765,74.257)
  Bottom Layer w0.203: v1(74.765,74.257) 75.057,74.549 75.311,74.549 ; 75.184,74.549 75.311,74.549 ; U3.30@75.38,67.464 76.792,67.464 77.16,67.832 77.16,67.869 78.403,69.112 79.786,69.112 79.787,69.113 80.67,69.113 81.026,69.469 81.026,74.041 80.518,74.549 75.311,74.549
G0: U1.93 U3.4 | length 10.5
  Top Layer w0.203: v1@72.517,56.007 72.842,55.682 72.842,50.231 U1.93@72.765,50.153
  Bottom Layer w0.203: U3.4@68.13,55.964 68.158,55.936 72.573,55.936 v1(72.601,55.964)
G1: U1.124 U3.6 | length 17.1
  Top Layer w0.203: v1(70.739,56.515) 70.739,56.712 71.249,57.221 71.788,57.221 72.263,57.697 72.263,58.42 74.112,60.269 81.52,60.269 81.636,60.153 U1.124@82.765,60.153
  Bottom Layer w0.203: U3.6@68.072,57.023 U3.6@68.13,56.964 ; U3.6@68.199,56.896 U3.6@68.13,56.964 ; v1(70.739,56.515) 69.449,56.515 69,56.964 U3.6@68.13,56.964
G2: U1.125 U3.7 | length 16.5
  Top Layer w0.203: v1(70.612,57.404) 70.81,57.602 71.63,57.602 71.882,57.855 71.882,58.674 73.861,60.653 U1.125@82.765,60.653
  Bottom Layer w0.203: U3.7@68.13,57.464 70.552,57.464 v1(70.612,57.404)
G3: U1.126 U3.11 | length 15.3
  Top Layer w0.203: v1(71.628,60.071) 72.71,61.153 U1.126@82.765,61.153
  Bottom Layer w0.203: U3.11@68.13,59.436 70.047,59.436 ; 70.118,59.365 70.922,59.365 v1(71.628,60.071)
G4: U1.127 U3.12 | length 15.2
  Top Layer w0.203: v1(70.358,59.944) 70.429,60.015 70.668,60.254 70.991,60.254 71.388,60.65 71.669,60.65 72.552,61.534 73.033,61.534 73.152,61.653 U1.127@82.765,61.653
  Bottom Layer w0.203: U3.12@68.13,59.944 69.412,59.944 ; 69.483,60.015 v1@70.287,60.015
G5: U1.128 U3.14 | length 15.3
  Top Layer w0.203: v1(70.739,60.833) 71.032,60.833 71.23,61.031 71.249,61.031 72.37,62.153 72.748,62.153 72.827,62.074 82.685,62.074 U1.128@82.765,62.153
  Bottom Layer w0.203: U3.14@68.13,60.96 70.612,60.96 v1(70.739,60.833)
G6: U1.129 U3.8 | length 18.1
  Top Layer w0.203: v1(73.067,62.653) U1.129@82.765,62.653
  Bottom Layer w0.203: U3.8@68.13,57.964 70.283,57.964 70.485,58.166 ; 70.358,58.039 70.485,58.166 ; 70.739,58.674 71.049,58.984 71.36,58.984 72.39,60.014 72.39,61.976 v1(73.067,62.653) ; 70.754,58.659 70.668,58.572 70.668,58.291 70.542,58.166 70.485,58.166
G7: U1.132 U3.10 | length 18
  Top Layer w0.203: v1(69.977,58.674) 69.977,58.801 69.779,58.999 69.779,60.692 73.222,64.135 73.66,64.135 ; 73.66,64.153 U1.132@82.765,64.153
  Bottom Layer w0.203: U3.10@68.58,58.928 69.036,58.928 69.29,58.674 v1(69.977,58.674)
GND: BFU.1 C1.2 C2.2 C3.1 C4.1 C5.2 C6.2 C7.1 C8.1 C9.1 C10.1 C11.1 C12.1 C13.1 C14.1 C15.1 C16.1 C17.1 C18.1 C19.1 C20.1 C21.1 C22.1 C23.1 C24.2 C25.2 C27.2 C28.1 C29.1 C30.2 C31.1 C34.1 C35.2 C36.1 C37.1 C38.1 C40.1 C41.1 C42.2 C43.1 C44.2 C45.2 C46.2 C47.1 C48.1 C49.1 C50.1 C51.1 C52.1 C53.2 D2.1 D5.2 D6.2 D8.1 DC_IN1.2 DC_IN1.3 DS5.2 J_BOOT.5 J_BOOT.6 JTAG1.4 JTAG1.6 JTAG1.8 JTAG1.10 JTAG1.12 JTAG1.14 JTAG1.16 JTAG1.18 JTAG1.20 K0.2 K1.1 K2.1 K3.1 K4.1 P1.9 P1.12 P1.15 P1.18 P1.21 P1.24 P1.26 P1.28 P1.33 P3.3 R10.2 R22.1 R33.1 R34.2 R35.2 R37.2 R38.2 R42.2 R46.1 R51.2 R52.2 R53.2 R54.2 SD_CARD1.3 SD_CARD1.6 U1.16 U1.31 U1.38 U1.51 U1.61 U1.83 U1.94 U1.107 U1.120 U1.130 U2.2 U3.5 U3.13 U3.21 U3.29 U3.33 U3.35 U3.36 U3.43 U3.49 U3.53 U4.2 U5.1 U6.5 USB1.4 USB1.5 USB1.6 | length 591.1
  Top Layer w0.203: USB1.6@28.801,46.342 31.737,46.342 32.131,46.736 USB1.4@32.131,49.657 ; C52.1@36.373,52.324 36.528,52.479 39.95,52.479 40.113,52.316 40.113,51.2 41.402,49.911 42.418,50.927 45.974,50.927 46.99,51.943 v1(46.99,54.102) ; R33.1@41.326,58.42 41.326,58.852 41.529,59.055 C35.2@43.688,59.055 ; C35.2@43.815,59.055 C35.2@43.688,59.055 ; v1(44.958,59.055) C35.2@43.688,59.055 ; D8.1@46.736,28.702 46.99,28.448 53.467,28.448 54.356,29.337 56.515,29.337 56.642,29.21 59.69,29.21 59.944,28.956 70.485,28.956 ; C46.2@50.8,45.264 C50.1@54.229,41.834 C48.1@58.293,41.834 59.563,43.105 59.563,43.688 59.944,44.069 C42.2@60.96,44.069 ; v1(54.61,62.484) C12.1@55.702,62.484 ; C5.2@55.626,52.832 55.702,52.908 C13.1@55.702,57.912 ; C13.1@55.626,57.912 55.753,58.039 55.753,58.547 ; C14.1@55.702,50.8 55.702,52.781 C5.2@55.753,52.832 ; C11.1@57.023,69.596 57.08,69.653 58.166,69.653 ; U1.51@60.265,63.153 56.041,63.153 55.753,62.865 55.753,59.944 55.753,58.547 ; v1(61.722,43.307) C42.2@60.96,44.069 ; v1(62.408,41.834) C43.1@63.5,41.834 ; v1(63.957,65.329) v1@64.008,65.278 ; v1(64.324,61.468) 64.324,62.8 v1(65.988,64.464) 66.04,64.516 64.77,64.516 v1@64.008,65.278 ; v1@64.77,76.581 v1(64.897,76.454) ; K0.2@64.825,27.178 64.825,28.901 ; v1(65.024,74.041) 65.265,73.8 U1.31@65.265,72.653 65.265,71.234 64.763,70.732 64.227,70.732 64.162,70.668 58.73,70.668 58.166,70.104 58.166,69.653 ; v1@65.024,76.581 R46.1@65.024,78.308 ; C15.1@65.786,46.736 65.786,47.244 66.167,47.625 67.183,47.625 67.765,48.207 U1.83@67.765,50.153 ; C15.1@65.913,46.736 65.405,46.228 65.374,46.228 64.993,45.847 v1(64.897,45.847) 63.119,44.069 C42.2@60.96,44.069 ; v1(65.913,59.436) 66.218,59.131 v1(66.218,56.464) ; 66.167,58.42 v1(62.992,58.42) 61.595,58.42 61.328,58.153 U1.61@60.265,58.153 58.814,58.153 58.039,58.928 56.134,58.928 55.753,58.547 ; K4.1@70.485,27.178 70.485,28.956 ; K4.1@70.485,34.925 70.485,28.956 ; K4.1@70.485,35.052 73.839,38.406 73.839,39.505 74.295,39.96 U4.2@74.295,40.737 ; C16.1@71.958,46.736 72.644,46.05 v1(72.644,45.847) ; U1.16@72.765,72.653 72.765,74.289 75.438,76.962 v1(75.438,79.502) 74.803,79.502 C9.1@74.676,79.502 ; U1.94@73.279,50.038 73.279,52.197 ; v1(76.708,55.626) 73.279,52.197 ; C6.2@77.025,46.738 77.468,46.738 v1(77.47,46.736) ; K3.1@78.105,27.178 78.105,28.829 ; K3.1@78.105,35.178 78.105,36.83 78.549,37.274 R53.2@78.613,37.338 ; C51.1@78.613,40.513 79.375,39.751 81.788,39.751 C44.2@82.804,40.767 ; 79.756,51.308 79.192,51.872 78.5,51.872 78.175,52.197 73.279,52.197 ; U1.107@79.765,50.153 79.765,51.317 80.137,51.689 80.772,51.689 81.407,51.054 81.407,46.736 C17.1@81.458,46.736 v1(82.55,46.736) 84.074,46.736 85.217,45.593 85.217,41.402 84.582,40.767 C44.2@82.804,40.767 ; v1(80.01,59.436) 81.28,58.166 U1.120@82.931,58.166 ; R52.2@80.137,37.211 81.915,37.211 82.804,38.1 C44.2@82.804,40.767 ; U1.130@82.765,63.153 84.675,63.153 85.09,62.738 87.122,62.738 87.376,62.992 C19.1@87.376,63.5 ; U1.120@82.931,58.153 84.722,58.153 84.841,58.034 85.146,58.034 85.419,57.761 86.412,57.761 86.436,57.785 87.122,57.785 C18.1@87.376,58.039 ; K2.1@85.725,27.178 85.725,28.956 ; R35.2@93.027,47.242 94.613,47.242 R34.2@94.615,47.244 ; R34.2@94.742,47.244 94.742,46.863 v1(94.996,46.609) ; C41.1@94.742,65.532 94.742,64.135 94.869,64.008 94.869,63.816 R42.2@96.139,62.546 ; C36.1@96.063,48.768 v1(96.774,48.768) ; R38.2@96.075,50.29 v1(96.772,50.29) ; R37.2@96.075,51.814 v1(96.772,51.814) ; R42.2@96.203,62.482 R42.2@96.201,62.484 ; P1.9@98.959,54.194 v1(100.111,54.194) ; P1.12@98.959,55.694 100.008,55.694 100.203,55.499 v1@100.203,54.356 ; P1.15@98.959,57.194 99.993,57.194 100.203,57.404 100.203,58.547 100.076,58.674 100.203,58.801 100.203,60.071 100.076,60.198 100.203,60.325 100.203,61.595 100.076,61.722 100.203,61.849 100.203,62.357 99.866,62.694 P1.26@98.959,62.694 97.238,62.694 97.028,62.484 R42.2@96.201,62.484 ; P1.18@98.959,58.694 100.056,58.694 ; P1.21@98.959,60.194 100.072,60.194 ; P1.24@98.959,61.694 100.048,61.694 ; P1.33@98.959,66.194 P1.33@98.986,66.167 ; P1.33@99.06,66.167 P1.33@98.986,66.167 ; 99.949,63.881 99.888,63.82 ; 100.017,55.694 100.203,55.88 100.203,57.023 100.076,57.15 ; U6.5@101.458,38.1 101.473,38.1 102.362,38.1 102.743,37.719 102.743,29.464 102.235,28.956 93.345,28.956 85.725,28.956 ; J_BOOT.6@104.14,75.184 J_BOOT.5@101.6,75.184 101.346,75.184 101.346,74.549 97.409,70.612 97.409,66.421 97.663,66.167 P1.33@98.986,66.167 ; 58.166,69.653 U1.38@60.265,69.653 61.919,69.653 62.23,69.342 62.23,66.675 63.627,65.278 v1@64.008,65.278 ; 70.485,28.956 85.725,28.956 ; R42.2@96.139,62.546 96.139,62.484 R42.2@96.201,62.484 ; R42.2@96.139,62.546 96.139,62.611 96.647,63.119 97.663,63.119 98.238,63.694 P1.28@98.959,63.694 99.762,63.694 99.888,63.82 ; P1.33@98.986,66.167 99.03,66.123 99.725,66.123 99.888,65.96 99.888,63.82
  Top Layer w0.381: USB1.6@28.829,46.228 27.483,47.574 27.483,55.345 28.448,56.31 C30.2@28.448,59.055 28.448,60.579 28.829,60.96 33.147,60.96 33.909,60.198 35.773,60.198 36.687,61.112 37.998,61.112 38.022,61.087 ; 37.973,61.087 38.022,61.087 ; U2.2@38.1,60.198 38.1,61.009 38.022,61.087 ; JTAG1.18@40.894,84.074 40.894,79.756 37.338,76.2 C37.1@37.084,76.2 36.957,76.2 36.068,76.2 35.118,77.15 D5.2@34.32,77.15 33.335,77.15 33.147,76.962 33.147,74.168 33.655,73.66 36.576,73.66 37.211,73.025 C24.2@37.211,71.628 38.735,71.628 39.116,72.009 39.116,73.152 40.005,74.041 45.212,74.041 ; C34.1@41.148,63.322 40.716,63.322 40.132,62.738 40.132,61.595 39.649,61.112 38.587,61.112 38.562,61.087 38.022,61.087 ; D2.1@45.212,72.39 45.212,74.041 ; C25.2@48.26,72.009 C38.1@48.26,75.184 48.133,75.311 46.736,75.311 46.581,75.466 D6.2@45.212,75.466 45.212,74.041 ; JTAG1.12@48.514,84.201 48.514,84.189 51.551,81.152 51.551,78.827 R22.1@52.324,78.054 ; C2.2@53.023,59.942 55.751,59.942 55.753,59.944 ; C10.1@58.928,78.359 C10.1@58.928,78.308 58.928,76.835 59.436,76.327 61.976,76.327 ; C8.1@61.976,78.308 61.976,76.327 ; C7.1@63.5,78.308 63.5,76.327 ; v1@64.77,76.327 63.5,76.327 ; C3.1@69.596,85.014 69.596,85.09 69.723,84.963 74.422,84.963 v1(74.676,84.709) 74.676,79.502 C9.1@74.676,79.426 74.676,79.375 C9.1@74.803,79.502 ; v1(75.438,79.502) 76.2,79.502 76.263,79.438 C53.2@81.282,79.438 ; R54.2@77.087,37.274 78.549,37.274 R53.2@78.611,37.274 80.073,37.274 R52.2@80.137,37.338 ; C20.1@87.3,72.136 87.3,70.561 R10.2@87.376,70.485 ; K1.1@93.345,27.178 93.345,28.956 ; 93.345,33.274 K1.1@93.345,35.178 ; U6.5@101.473,38.1 U6.5@101.536,38.036 ; 61.976,76.327 63.5,76.327
  Bottom Layer w0.203: v1(44.958,59.055) 49.53,59.055 ; v1(46.99,54.102) 48.006,55.118 51.816,55.118 ; SD_CARD1.3@53.331,62.611 50.673,62.611 49.53,61.468 49.53,59.055 ; SD_CARD1.6@53.34,55.118 51.816,55.118 ; SD_CARD1.3@53.34,62.611 53.467,62.484 v1(54.61,62.484) ; v1(61.722,43.307) 62.357,42.672 v1@62.357,41.783 ; v1(62.992,58.42) 63.754,58.42 C22.1@64.008,58.166 ; R51.2@63.817,61.974 v1(64.324,61.468) ; v1(63.957,65.329) C21.1@63.957,66.294 ; v1(64.897,45.847) v1(72.644,45.847) 76.581,45.847 v1(77.47,46.736) v1(82.55,46.736) ; v1(65.024,74.041) 65.024,76.454 v1(64.897,76.454) 67.945,79.502 v1(75.438,79.502) ; v1(65.913,59.436) 66.941,60.464 U3.13@68.13,60.464 ; v1(65.988,64.464) U3.21@68.13,64.464 ; v1(66.218,56.464) U3.5@68.13,56.464 ; 74.422,65.913 74.473,65.964 74.498,65.964 ; 74.439,65.893 74.276,65.73 74.276,65.198 74.45,65.024 U3.35@75.38,65.024 ; 74.542,57.912 74.276,58.179 74.276,60.73 74.439,60.893 75.371,60.893 75.438,60.96 75.363,61.035 74.439,61.035 74.168,61.306 74.168,64.262 74.37,64.464 U3.36@75.38,64.464 76.529,64.464 76.708,64.643 ; 74.549,65.913 74.498,65.964 ; U3.49@75.38,57.912 U3.49@75.432,57.912 ; U3.35@75.38,64.964 76.514,64.964 76.708,64.77 76.708,64.643 ; U3.33@75.38,65.964 74.498,65.964 ; U3.53@75.413,55.931 U3.53@75.38,55.964 76.281,55.964 ; U3.49@75.438,57.912 U3.49@75.432,57.912 ; U3.49@75.451,57.893 U3.49@75.432,57.912 ; v1(76.581,68.072) 76.473,67.964 U3.29@75.38,67.964 75.309,67.893 74.439,67.893 74.276,67.73 74.276,66.186 74.498,65.964 ; v1(76.708,55.626) 76.37,55.964 76.281,55.964 ; v1(80.01,59.436) 80.01,59.36 C29.1@80.442,58.928 ; C28.1@80.518,65.024 80.518,64.643 80.237,64.362 78.561,64.362 78.28,64.643 76.708,64.643 ; v1(94.996,46.609) 96.774,48.387 v1(96.774,48.768) 96.772,48.77 v1(96.772,50.29) v1(96.772,51.814) v1@96.774,51.816 ; v1@96.901,51.943 v1@96.774,51.816 ; v1(100.111,54.194) 100.111,52.486 99.441,51.816 v1@96.774,51.816 ; 49.53,59.055 49.53,57.404 51.816,55.118 ; U3.49@75.432,57.912 U3.49@75.38,57.964 76.25,57.964 76.484,57.73 76.484,56.168 76.281,55.964
  Bottom Layer w0.381: JTAG1.20@38.354,84.074 JTAG1.18@40.894,84.074 JTAG1.16@43.434,84.074 JTAG1.14@45.974,84.074 JTAG1.12@48.514,84.074 JTAG1.10@51.054,84.074 JTAG1.8@53.594,84.074 JTAG1.6@56.134,84.074 JTAG1.4@58.674,84.074 59.055,84.074 60.325,82.804 73.914,82.804 74.676,83.566 v1(74.676,84.709) 75.692,85.725 P3.3@75.692,87.884
  other v1: 82.677,47.879 84.582,47.879 87.757,47.879 89.535,47.879 82.677,49.403 84.582,49.403 87.757,49.403 89.535,49.403 82.677,50.927 84.582,50.927 87.757,50.927 89.535,50.927 101.219,52.197 102.997,52.197 84.582,52.451 87.757,52.451 89.535,52.451 101.219,53.848 102.997,53.848 84.582,54.102 87.757,54.102 89.535,54.102 101.219,55.626 102.997,55.626 101.219,57.404 102.997,57.404 101.219,59.055 102.997,59.055 101.219,60.706 102.997,60.706 101.219,62.103 102.997,62.103 101.219,63.5 102.997,63.5 101.219,64.897 102.997,64.897 101.219,66.294 102.997,66.294
HSYNC: U1.10 U3.27 | length 11.8
  Top Layer w0.203: v1(69.342,69.85) 74.292,69.85 75.765,71.323 U1.10@75.765,72.653
  Bottom Layer w0.203: U3.27@68.13,67.464 69.115,67.464 69.342,67.691 v1(69.342,69.85)
JTCK: JTAG1.9 R22.2 U1.109 | length 63.2
  Top Layer w0.203: R22.2@52.324,79.375 52.324,79.756 52.326,79.758 v1(52.832,80.264) ; v1(78.74,52.451) 78.982,52.693 82.725,52.693 U1.109@82.765,52.653
  Top Layer w0.381: JTAG1.9@51.054,86.614 49.873,85.433 49.873,83.621 52.326,81.168 R22.2@52.326,79.758
  Bottom Layer w0.203: v1(52.832,80.264) 56.261,76.835 56.261,58.135 61.31,53.086 62.511,53.086 64.67,50.927 77.216,50.927 v1(78.74,52.451)
JTDI: JTAG1.5 R19.2 U1.110 | length 60
  Top Layer w0.203: R19.2@55.372,79.502 55.374,79.504 55.88,80.01 v1(55.88,80.137) ; v1(76.962,53.086) 79.279,53.086 79.291,53.074 80.772,53.074 ; 80.772,53.086 80.839,53.153 U1.110@82.765,53.153
  Top Layer w0.381: R19.2@55.374,79.438 55.374,79.504 55.374,83.164 54.953,83.585 54.953,85.433 JTAG1.5@56.134,86.614
  Bottom Layer w0.203: v1(55.88,80.137) 57.023,78.994 57.023,58.451 61.626,53.848 62.827,53.848 64.986,51.689 75.438,51.689 76.835,53.086 v1(76.962,53.086)